# Altium PCB rookieboard_macrofab.PcbDoc (part 3 of 3)
Units mm, origin at the board's own origin, x right, y up, seen from the top; angles counter-clockwise.
Board outline 100 x 50 mm, 4 copper layers (Top Layer, Ground, Power, Bottom Layer), stack 0.971 mm thick; 136 components, 90 nets, 459 pads, 215 vias.
Unrouted connection lines stored in the file: 2.
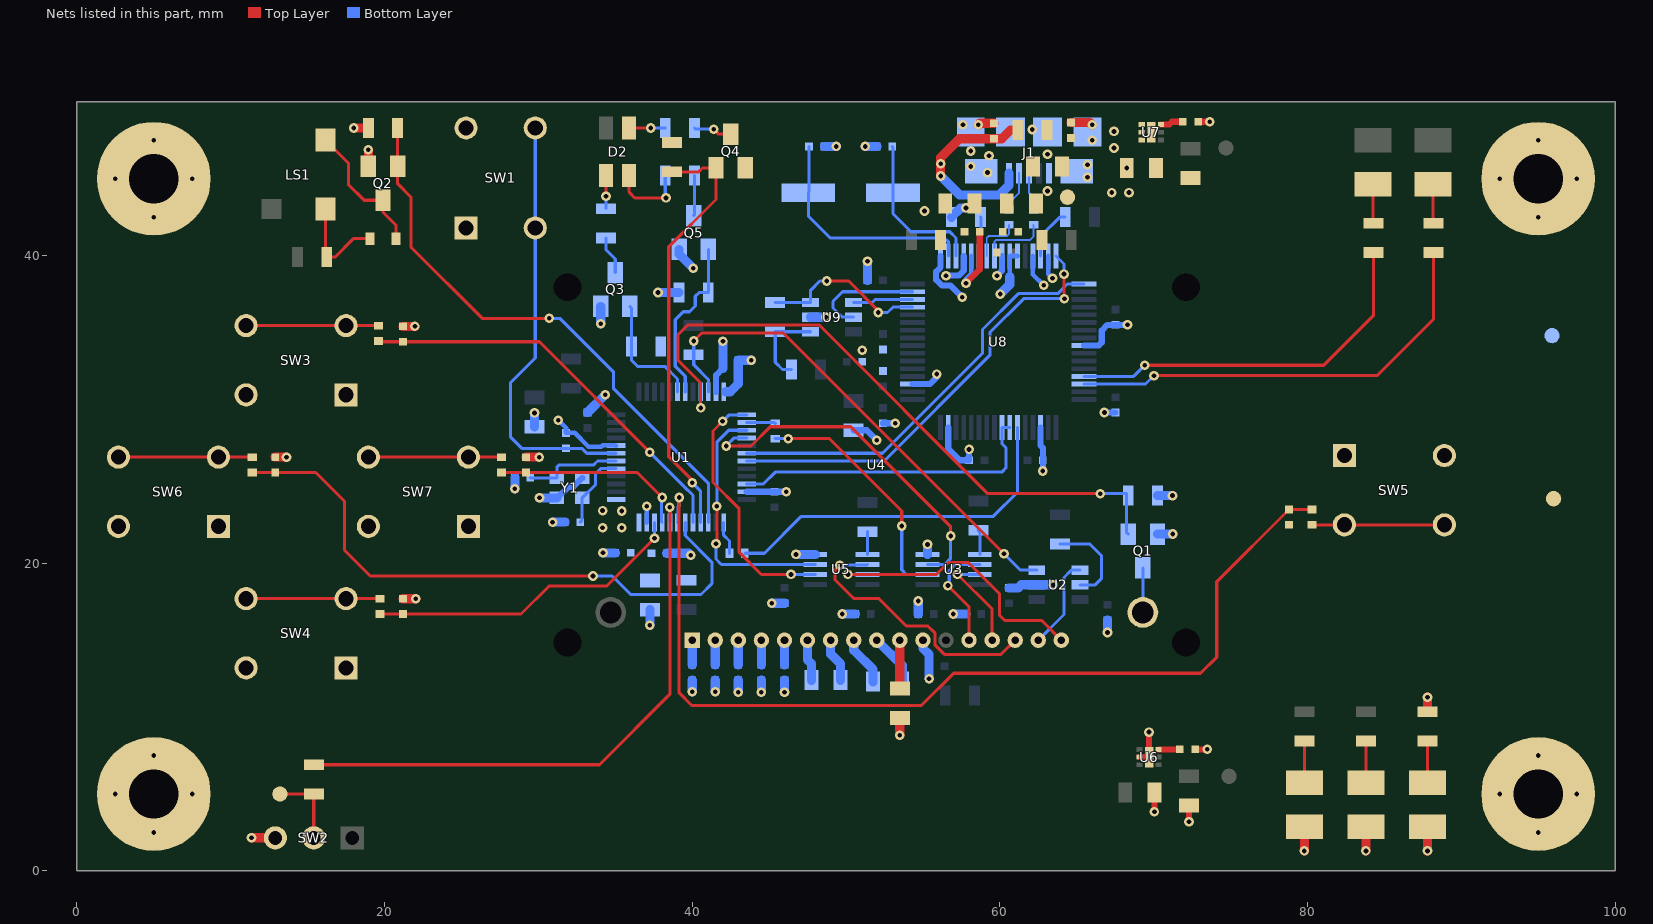
[diagram p4: the nets of this part, all layers, seen from the top]

## Via types
v1: diameter 0.625, hole 0.305, Top Layer to Bottom Layer, tented both sides, 185 vias
v2: diameter 0.625, hole 0.305, Top Layer to Bottom Layer, 16 vias
v3: diameter 0.625, hole 0.305, Top Layer to Bottom Layer, tented top, 11 vias
v4: diameter 0.625, hole 0.305, Top Layer to Bottom Layer, tented bottom, 3 vias

## Nets (pads, with @x,y where several pads share a name; then routed paths per layer and width w, separated by ;. In a path a pad name is that pad's centre, name@x,y a point inside that pad or via, vN(x,y) a via of type N, cw(c..) or ccw(c..) an arc to the next point about the centre after c; other vN are vias at no path point) (continued)
+3V3_MCU_VDD: C2.2 C3.2 C4.2 C5.2 E1.2 U1.1 U1.24 U1.48 | length 3.4
  Bottom Layer w0.6: U1.24@42.177,31.15 42.475,31.15 43,31.675 C3.2@43,33.2 v1(43.85,33.2)
  other v1: 34.175,22.3 35.425,22.3 35.425,23.4 34.175,23.425
+5V: C32.2 C33.2 C37.2 E4.2 R22.2 TP9.1 U7.1 U7.3 | length 0.9
  Top Layer w0.6: R22.2@87.8,10.35 v1(87.8,11.3)
  other v1: 67.275,44.1 68.4,44.1 67.425,47 67.425,48.075
  other v4: 68.25,45.7
+5V_USB: C31.2 E4.1 J1.1 | length 13.8
  Top Layer w0.6: v1(56.15,45.175) v1(56.15,45.975) 56.15,46.375 57.375,47.6 C31.2@59.625,47.6 60.125,47.6 60.7,48.175 E4.1@61.175,48.175
  Bottom Layer w0.6: v1(56.15,45.975) v1(56.15,45.175) 57.375,43.95 59.975,43.95 60.6,44.575 J1.1@60.6,45.362
+VPHY_FT: C43.2 C44.2 E5.2 U8.4 | length 2.2
  Bottom Layer w0.4: v1(56.5,38.7) 57.317,38.7 57.65,39.033 U8.4@57.65,39.975
  other v1: 55.1,42.9
+VPLL_FT: C45.2 C46.2 E6.2 U8.9 | length 1.4
  Bottom Layer w0.4: v1(59.817,38.7) 60.132,39.015 60.132,39.957 U8.9@60.15,39.975
GND: C1.1 C2.1 C3.1 C4.1 C5.1 C6.1 C7.1 C8.1 C9.1 C10.1 C11.1 C12.2 C13.1 C14.1 C15.1 C16.2 C17.2 C18.2 C19.2 C20.2 C22.1 C23.1 C25.1 C26.1 C27.1 C28.1 C29.1 C30.1 C31.1 C32.1 C33.1 C34.1 C35.1 C36.1 C37.1 C38.1 C39.1 C40.1 C41.1 C42.1 C43.1 C44.1 C45.1 C46.1 C47.1 C48.1 C49.1 C50.1 C51.1 C52.1 C53.1 C54.1 C55.1 C56.1 D3.1 D4.1 D5.1 J1.5 J1.6 J1.7 J1.8 J1.9 J1.10 J1.11 MH1.1 MH2.1 MH3.1 MH4.1 Q1.2 Q2.2 Q3.2 Q4.2 Q5.2 R7.1 R12.1 R16.1 R18.1 R19.1 R28.1 SW1.1 SW1.2 SW2.3 SW3.1 SW3.2 SW4.1 SW4.2 SW5.1 SW5.2 SW6.1 SW6.2 SW7.1 SW7.2 TP6.1 TP7.1 U1.8 U1.23 U1.35 U1.47 U2.2 U3.4 U4.11 U5.4 U6.2@69.075,7.4 U6.7 U7.2@69.225,48.025 U7.7 U8.1 U8.5 U8.10 U8.11 U8.13 U8.15 U8.25 U8.35 U8.47 U8.51 U9.2 Y1.2 Y1.4 | length 102.4
  Top Layer w0.4: v1(57.8,38.2) 58.7,39.1 58.7,39.592 58.696,39.596 58.696,41.546 C44.1@58.7,41.55 ; U6.2@69.075,7.4 69.692,7.4 U6.7@69.7,7.392 v1(69.7,9.025) ; v1(70.05,3.85) C34.1@70.05,5.1 ; v1(72.3,3.2) C35.1@72.3,4.25 ; C36.1@72.7,7.9 v1(73.475,7.9) ; C39.1@72.9,48.7 v1(73.65,48.7)
  Top Layer w0.6: v1(11.35,2.15) SW2.3@12.9,2.15 ; C29.1@12.9,26.9 v1(13.625,26.9) ; v1(18,48.3) R12.1@18.95,48.3 ; Q2.2@18.95,45.8 v1(18.95,46.875) ; C27.1@21.2,17.7 v1(22.025,17.7) ; C26.1@21.2,35.4 v1(21.975,35.4) ; C30.1@29.2,26.9 v1(30.05,26.9) ; v1(53.5,8.825) C25.1@53.5,9.95 ; v3(58.6,48.5) 58.7,48.6 C31.1@59.625,48.6 ; C32.1@64.625,48.65 65.85,48.65 v3(66,48.5) ; v1(79.8,1.3) D5.1@79.8,2.875 ; v1(83.8,1.3) D4.1@83.8,2.875 ; v1(87.8,1.3) D3.1@87.8,2.875
  Bottom Layer w0.3: v1(31.3,29.3) 31.8,28.8 C1.1@31.8,28.475 32.359,28.475 33.261,27.573 34.089,27.573 34.189,27.673 35.027,27.673 U1.8@35.05,27.65 ; U1.47@37.05,22.65 v1(37.05,23.7) ; 58.15,38.75 U8.5@58.15,39.975 ; 60.65,38.625 U8.10@60.65,39.975 U8.11@61.15,39.975 ; U8.13@62.15,39.975 62.15,38.775 v1(62.85,38.075) ; U8.15@63.15,39.975 63.15,38.8 v1(63.425,38.525)
  Bottom Layer w0.4: Y1.2@31.2,24.25 31.237,24.25 31.964,24.977 32.277,24.977 Y1.4@32.85,25.55 ; U1.23@41.55,31.15 41.55,32.225 42,32.675 ; U1.35@43.55,24.65 C10.1@45.35,24.65 v1(46.125,24.65) ; C40.1@50.5,28.65 51.35,28.65 v1(52,28) ; C41.1@52.4,29.1 v1(53.2,29.1) ; U8.51@54.325,31.65 55.45,31.65 55.9,32.1 v1(55.9,32.3) ; U8.1@56.15,39.975 56.15,39.254 55.86,38.965 55.86,38.435 56.235,38.06 56.79,38.06 v1(57.55,37.3) ; U8.47@56.65,28.825 56.65,27.45 57.4,26.7 C48.1@58,26.7 v1(58,27.4) ; v1(57.8,38.2) 57.8,38.4 58.15,38.75 ; U8.35@62.65,28.825 62.65,27.65 62.8,27.5 C53.1@62.8,26.7 v1(62.8,26) ; U8.25@65.475,34.15 65.493,34.168 66.435,34.168 66.627,34.36 66.627,35.127 67,35.5 C50.1@67.525,35.5 v1(68.3,35.5) ; v1(66.8,29.8) C49.1@67.525,29.8
  Bottom Layer w0.6: v1(28.475,24.85) C7.1@28.475,25.575 ; C9.1@29.75,28.875 v1(29.75,29.775) ; v1(30.075,24.25) Y1.2@31.2,24.25 ; v1(30.925,22.675) C6.1@31.725,22.675 ; C8.1@33.2,29.8 v1(34.35,30.95) ; v1(34.05,35.575) Q3.2@34.05,36.7 ; v1(34.2,20.675) C4.1@35,20.675 ; v1(37.25,15.975) C5.1@37.25,16.975 ; v1(37.775,37.6) R19.1@39.15,37.6 ; C2.1@38.35,20.65 39.775,20.65 v1(39.9,20.525) ; Q5.2@39.15,40.4 39.15,40.1 v1(40.075,39.175) ; v1(40,11.65) C16.2@40,12.4 ; v1(41.5,11.65) C17.2@41.5,12.4 ; 42,32.675 C3.1@42,33.2 v1(42,34.425) ; v1(43,11.625) C18.2@43,12.4 ; v1(44.5,11.625) C19.2@44.5,12.4 ; v1(45.175,17.4) C22.1@46,17.4 ; v1(46,11.625) C20.2@46,12.4 ; v1(46.75,20.575) U5.4@48,20.575 ; U9.2@47.7,36 v1(48.7,36) ; C55.1@48.6,47.1 v1(49.375,47.1) ; v1(49.75,16.7) C23.1@50.6,16.7 ; v1(51.25,47.1) C56.1@52,47.1 ; C52.1@51.4,38.4 v1(51.4,39.625) ; C14.1@54.7,16.7 v1(54.7,17.55) ; U4.11@55,15 55,14.475 55.4,14.075 C13.1@55.4,13.3 v1(55.4,12.5) ; U3.4@55.3,20.575 v1(55.3,21.225) ; R28.1@56.85,42.5 57.45,43.1 v4(57.8,43.1) ; v1(56.975,16.7) C15.1@57.8,16.7 ; v1(60.025,37.5) 60.65,38.125 60.65,38.625 ; C11.1@60.6,18.4 61.2,18.4 61.4,18.6 U2.2@62.4,18.6 v1(63.475,18.6) ; v1(67,15.5) C12.2@67,16.3 ; Q1.2@70.25,21.9 v1(71.25,21.9) ; R7.1@70.25,24.4 v1(71.225,24.4)
  other v1: 51.05,33.85 63.1,46.6
  other v2: 5,2.5 95,2.5 2.5,5 7.5,5 92.5,5 97.5,5 5,7.5 95,7.5 5,42.5 95,42.5 2.5,45 7.5,45 92.5,45 97.5,45 5,47.5 95,47.5
  other v3: 65.7,45.1 59.2,45.4 58.1,45.8 65.7,45.9 59.3,46.5 58.1,46.8 66,47.5 62.1,48.2 57.6,48.5
  other v4: 63.1,44.2
NetC1_2: C1.2 SW1.3 SW1.4 U1.7 | length 28
  Bottom Layer w0.2: SW1.4@29.8,48.3 SW1.3@29.8,41.8 29.8,33.35 28.2,31.75 28.2,28.2 28.925,27.475 C1.2@31.8,27.475 32.825,27.475 33.15,27.15 U1.7@35.05,27.15
NetC6_2: C6.2 U1.5 Y1.1 | length 5
  Bottom Layer w0.2: C6.2@32.725,22.675 32.85,22.8 Y1.1@32.85,24.25 33.725,25.125 33.725,25.825 34.05,26.15 U1.5@35.05,26.15
NetC7_2: C7.2 U1.6 Y1.3 | length 6.5
  Bottom Layer w0.2: C7.2@29.475,25.575 29.5,25.55 Y1.3@31.2,25.55 31.2,26.25 31.325,26.375 33.575,26.375 33.85,26.65 U1.6@35.05,26.65
NetC16_1: C16.1 U4.1 | length 1.6
  Bottom Layer w0.6: C16.1@40,13.4 U4.1@40,15
NetC17_1: C17.1 U4.2 | length 1.6
  Bottom Layer w0.6: C17.1@41.5,13.4 U4.2@41.5,15
NetC18_1: C18.1 U4.3 | length 1.6
  Bottom Layer w0.6: C18.1@43,13.4 U4.3@43,15
NetC19_1: C19.1 U4.4 | length 1.6
  Bottom Layer w0.6: C19.1@44.5,13.4 U4.4@44.5,15
NetC20_1: C20.1 U4.5 | length 1.6
  Bottom Layer w0.6: C20.1@46,13.4 U4.5@46,15
NetC21_1: C21.1 U4.8 | length 3.2
  Bottom Layer w0.6: U4.8@50.5,15 50.5,14.35 51.75,13.1 C21.1@51.75,12.3
NetC21_2: C21.2 U4.9 | length 3.4
  Bottom Layer w0.6: U4.9@52,15 53.65,13.35 C21.2@53.65,12.3
NetC24_1: C24.1 U4.7 | length 2.9
  Bottom Layer w0.6: U4.7@49,15 49,14.1 49.65,13.45 C24.1@49.65,12.4
NetC24_2: C24.2 U4.6 | length 2.7
  Bottom Layer w0.6: U4.6@47.5,15 47.5,13.725 47.75,13.475 C24.2@47.75,12.4
NetC25_2: C25.2 U4.10 | length 3.1
  Top Layer w0.6: C25.2@53.5,11.85 U4.10@53.5,15
NetC26_2: C26.2 R5.2 U1.41 | length 26.4
  Top Layer w0.2: R5.2@19.6,34.45 19.65,34.4 C26.2@21.2,34.4 30.075,34.4 v1(37.25,27.225)
  Bottom Layer w0.2: v1(37.25,27.225) 39.46,25.015 39.46,25.002 40.05,24.412 U1.41@40.05,22.65
NetC27_2: C27.2 R8.2 U1.46 | length 20.9
  Top Layer w0.2: R8.2@19.7,16.7 C27.2@21.2,16.7 28.875,16.7 30.7,18.525 34.45,18.525 v1(37.55,21.625)
  Bottom Layer w0.2: v1(37.55,21.625) U1.46@37.55,22.65
NetC28_2: C28.2 R10.2 U1.43 | length 64
  Top Layer w0.2: v1(39.15,24.275) 39.15,11.575 39.975,10.75 54.9,10.75 57,12.85 73.05,12.85 74.1,13.9 74.1,18.8 C28.2@78.8,23.5 R10.2@80.3,23.5
  Bottom Layer w0.2: U1.43@39.05,22.65 39.09,22.65 39.09,23.675 39.15,23.735 v1(39.15,24.275)
NetC29_2: C29.2 R11.2 U1.42 | length 40
  Top Layer w0.2: R11.2@11.4,25.9 C29.2@12.9,25.9 15.525,25.9 17.4,24.025 17.4,20.85 19.075,19.175 v1(33.55,19.175)
  Bottom Layer w0.2: v1(33.55,19.175) 34.8,19.175 36,17.975 40.575,17.975 41.275,18.675 41.275,20.075 39.55,21.8 U1.42@39.55,22.65
NetC30_2: C30.2 R17.2 U1.45 | length 12.8
  Top Layer w0.2: R17.2@27.6,25.9 C30.2@29.2,25.9 36.425,25.9 v1(38.05,24.275)
  Bottom Layer w0.2: U1.45@38.05,22.65 38.011,22.69 38.011,24.235 v1(38.05,24.275)
NetC36_2: C36.2 U6.6 | length 1.4
  Top Layer w0.4: U6.6@70.325,7.9 C36.2@71.7,7.9
NetC39_2: C39.2 U7.6 | length 1.5
  Top Layer w0.4: U7.6@70.475,48.525 71.025,48.525 71.2,48.7 C39.2@71.9,48.7
NetC55_2: C55.2 U8.2 Y2.2 | length 15.3
  Bottom Layer w0.2: C55.2@47.6,47.1 47.6,44.15 Y2.2@47.55,44.1 47.55,42.575 48.975,41.15 56.4,41.15 56.65,40.9 U8.2@56.65,39.975
NetC56_2: C56.2 U8.3 Y2.1 | length 10.3
  Bottom Layer w0.2: C56.2@53,47.1 53.05,47.05 Y2.1@53.05,44.1 53.05,42.725 54.225,41.55 56.75,41.55 57.15,41.15 U8.3@57.15,39.975
NetD1_1: D1.1 LS1.2 Q2.3 | length 9
  Top Layer w0.2: LS1.2@16.15,47.523 17.65,46.023 17.65,44.625 18.675,43.6 Q2.3@19.9,43.6 19.9,42.825 20.75,41.975 D1.1@20.75,41.1
NetD1_2: D1.2 LS1.1 R9.1 | length 6.5
  Top Layer w0.2: LS1.1@16.15,43.023 16.15,40 R9.1@16.25,39.9 16.775,39.9 17.975,41.1 D1.2@19.05,41.1
NetD2_1: D2.1 R15.2 | length 5.1
  Top Layer w0.2: D2.1@35.9,45.2 35.9,44.125 36.275,43.75 v1(38.3,43.75)
  Bottom Layer w0.2: R15.2@38.25,45.2 38.25,43.8 v1(38.3,43.75)
NetD2_2: D2.2 R14.2 | length 2.4
  Top Layer w0.2: D2.2@35.9,48.3 v1(37.3,48.3)
  Bottom Layer w0.2: v1(37.3,48.3) R14.2@38.25,48.3
NetD2_3: D2.3 R13.2 | length 2.1
  Top Layer w0.2: v1(34.4,43.85) D2.3@34.4,45.2
  Bottom Layer w0.2: R13.2@34.4,43.05 v1(34.4,43.85)
NetD3_2: D3.2 R22.1 | length 2.7
  Top Layer w0.2: D3.2@87.8,5.725 R22.1@87.8,8.45
NetD4_2: D4.2 R23.1 | length 2.7
  Top Layer w0.2: D4.2@83.8,5.725 R23.1@83.8,8.45
NetD5_2: D5.2 R24.1 | length 2.7
  Top Layer w0.2: D5.2@79.8,5.725 R24.1@79.8,8.45
NetD6_1: D6.1 R25.2 | length 2.6
  Top Layer w0.2: D6.1@84.25,44.65 84.25,42.15 R25.2@84.3,42.1
NetD7_1: D7.1 R26.2 | length 2.6
  Top Layer w0.2: D7.1@88.15,44.65 88.15,42.15 R26.2@88.2,42.1
NetQ1_1: Q1.1 R7.2 U1.21 | length 43.1
  Top Layer w0.2: v1(40.55,30.1) 40.55,31.725 39.075,33.2 39.075,34.85 39.725,35.5 48.25,35.5 59.225,24.525 v1(66.525,24.525)
  Bottom Layer w0.2: v1(40.55,30.1) U1.21@40.55,31.15 ; v1(66.525,24.525) 68.225,24.525 68.225,22.025 Q1.1@68.35,21.9
NetQ1_3: Q1.3 U4.19 | length 2.9
  Bottom Layer w0.2: U4.19@69.3,16.8 Q1.3@69.3,19.7
NetQ2_1: Q2.1 R12.2 U1.39 | length 37
  Top Layer w0.2: R12.2@20.85,48.3 Q2.1@20.85,45.8 20.85,44.675 21.725,43.8 21.725,40.55 26.35,35.925 v1(30.7,35.925)
  Bottom Layer w0.2: v1(30.7,35.925) 31.4,35.925 34.875,32.45 34.875,31.375 41.05,25.2 U1.39@41.05,22.65
NetQ3_1: Q3.1 R16.2 U1.18 | length 7.9
  Bottom Layer w0.2: Q3.1@35.95,36.7 36.05,36.6 R16.2@36.05,34.1 36.05,33.2 36.45,32.8 38.225,32.8 39.05,31.975 U1.18@39.05,31.15
NetQ3_3: Q3.3 R13.1 | length 2.5
  Bottom Layer w0.2: R13.1@34.4,41.15 34.4,40.375 35,39.775 Q3.3@35,38.9
NetQ4_1: Q4.1 R18.2 U1.40 | length 28.1
  Top Layer w0.2: R18.2@38.7,45.45 40.425,45.45 40.675,45.7 Q4.1@41.55,45.7 41.55,43.65 38.475,40.575 38.475,26.925 40,25.4 v1(40,25.225)
  Bottom Layer w0.2: v1(40,25.225) 40.55,24.675 U1.40@40.55,22.65
NetQ4_3: Q4.3 R14.1 | length 2.5
  Top Layer w0.2: v1(41.4,48.225) 41.725,47.9 Q4.3@42.5,47.9
  Bottom Layer w0.2: R14.1@40.15,48.3 40.225,48.225 v1(41.4,48.225)
NetQ5_1: Q5.1 R19.2 U1.19 | length 11
  Bottom Layer w0.2: U1.19@39.55,31.15 39.55,32.15 38.9,32.8 38.9,35.825 39.425,36.35 39.825,36.35 40.2,36.725 40.2,37.35 40.45,37.6 R19.2@41.05,37.6 Q5.1@41.05,40.4
NetQ5_3: Q5.3 R15.1 | length 2.6
  Bottom Layer w0.2: Q5.3@40.1,42.6 40.15,42.65 R15.1@40.15,45.2
NetR1_1: R1.1 SW2.2 TP1.1 | length 5.1
  Top Layer w0.2: TP1.1@13.2,5 R1.1@15.4,5 SW2.2@15.4,2.15
NetR1_2: R1.2 U1.44 | length 38.2
  Top Layer w0.2: R1.2@15.4,6.9 33.975,6.9 38.55,11.475 v1(38.55,23.65)
  Bottom Layer w0.2: U1.44@38.55,22.65 v1(38.55,23.65)
NetR2_1: R2.1 U1.22 U2.3 | length 32.6
  Top Layer w0.2: v1(40.1,34.45) 40.625,34.975 45.925,34.975 v1(60.275,20.625)
  Bottom Layer w0.2: v1(40.1,34.45) R2.1@40.1,33.55 40.1,32.9 41.05,31.95 U1.22@41.05,31.15 ; v1(60.275,20.625) 61.35,19.55 U2.3@62.4,19.55
NetR3_2: R3.2 U2.5 | length 6.1
  Bottom Layer w0.2: R3.2@63.9,21.25 65.85,21.25 66.6,20.5 66.6,19 66.2,18.6 U2.5@65.2,18.6
NetR4_2: R4.2 U3.5 | length 1.6
  Bottom Layer w0.2: R4.2@58.6,22.15 58.7,22.05 U3.5@58.7,20.575
NetR5_1: R5.1 SW3.3 SW3.4 | length 8.6
  Top Layer w0.2: SW3.4@11,35.45 SW3.3@17.5,35.45 R5.1@19.6,35.45
NetR6_2: R6.2 U5.5 | length 1.5
  Bottom Layer w0.2: U5.5@51.4,20.575 R6.2@51.4,22.05
NetR8_1: R8.1 SW4.3 SW4.4 | length 8.7
  Top Layer w0.2: SW4.4@11,17.7 SW4.3@17.5,17.7 R8.1@19.7,17.7
NetR10_1: R10.1 SW5.3 SW5.4 | length 8.6
  Top Layer w0.2: R10.1@80.3,22.5 SW5.3@82.4,22.5 SW5.4@88.9,22.5
NetR11_1: R11.1 SW6.3 SW6.4 | length 8.7
  Top Layer w0.2: SW6.4@2.7,26.9 R11.1@11.4,26.9
NetR17_1: R17.1 SW7.3 SW7.4 | length 8.6
  Top Layer w0.2: SW7.4@18.95,26.9 SW7.3@25.45,26.9 R17.1@27.6,26.9
NetR20_2: R20.2 U8.7 | length 3.3
  Bottom Layer w0.127: U8.7@59.15,39.975 59.15,41.15 59.275,41.275 60.45,41.275 60.6,41.425 R20.2@60.6,42
NetR21_2: R21.2 U8.8 | length 4.4
  Bottom Layer w0.13: U8.8@59.65,39.975 59.65,40.9 59.769,41.019 61.969,41.019 62.2,41.25 R21.2@62.2,42
NetR27_2: R27.2 U8.14 | length 3.4
  Bottom Layer w0.2: U8.14@62.65,39.975 62.65,41.25 63.9,42.5 R27.2@64.25,42.5
NetR28_2: R28.2 U8.6 | length 2.6
  Bottom Layer w0.2: U8.6@58.65,39.975 58.65,41.275 58.775,41.4 58.775,42.475 R28.2@58.75,42.5
NetR29_2: R29.2 R30.1 U9.1 | length 5.5
  Bottom Layer w0.2: R29.2@46.45,32.6 45.875,32.6 45.4,33.075 R30.1@45.4,35.05 U9.1@47.7,35.05
NetR30_2: R30.2 U8.61 U9.3 | length 11
  Top Layer w0.2: v1(48.75,38.35) 50.175,38.35 52.1,36.425 v1(52.1,36.3)
  Bottom Layer w0.2: R30.2@45.4,36.95 U9.3@47.7,36.95 47.7,37.75 48.3,38.35 v1(48.75,38.35) ; v1(52.1,36.3) 52.7,36.3 53.05,36.65 U8.61@54.325,36.65
NetR31_1: R31.1 U1.26 | length 1.9
  Bottom Layer w0.2: U1.26@43.55,29.15 45.35,29.15 R31.1@45.4,29.1
NetR31_2: R31.2 U3.2 | length 15.8
  Top Layer w0.2: v1(46.25,28.1) 48.925,28.1 53.625,23.4 v1(53.625,22.425)
  Bottom Layer w0.2: R31.2@45.4,28.1 v1(46.25,28.1) ; v1(53.625,22.425) 53.625,19.575 53.925,19.275 U3.2@55.3,19.275
NetR32_2: R32.2 U1.37 | length 2.2
  Bottom Layer w0.2: U1.37@42.05,22.65 42.05,21.825 42.425,21.45 R32.2@42.425,20.65
NetU1_25: U1.25 U5.2 | length 16.8
  Top Layer w0.2: v1(41.975,29.225) 41.35,28.6 41.35,25.25 43.05,23.55 43.05,20.725 44.5,19.275 v1(46.425,19.275)
  Bottom Layer w0.2: v1(41.975,29.225) 42.4,29.65 U1.25@43.55,29.65 ; v1(46.425,19.275) U5.2@48,19.275
NetU1_27: U1.27 U5.3 | length 16.5
  Top Layer w0.2: v1(41.55,21.275) 41.6,21.325 v1(41.6,23.7)
  Bottom Layer w0.2: v1(41.55,21.275) 41.55,20.275 41.9,19.925 U5.3@48,19.925 ; v1(41.6,23.7) 41.6,27.875 42.375,28.65 U1.27@43.55,28.65
NetU1_28: U1.28 U3.3 | length 23.1
  Top Layer w0.2: v1(42.225,27.625) 43.825,27.625 45.075,28.875 50.3,28.875 56.8,22.375 v1(56.8,21.775)
  Bottom Layer w0.2: v1(42.225,27.625) 42.2,27.625 42.725,28.15 U1.28@43.55,28.15 ; U3.3@55.3,19.925 56.4,19.925 56.8,20.325 v1(56.8,21.775)
NetU1_34: U1.34 U8.39 U8.40 | length 20.5
  Bottom Layer w0.2: U1.34@43.55,25.15 44.625,25.15 45.4,25.925 60.125,25.925 60.4,26.2 60.4,27.5 60.15,27.75 U8.40@60.15,28.825 U8.39@60.65,28.825
NetU2_4: U2.4 U4.16 | length 6
  Bottom Layer w0.2: U4.16@62.5,15 64.175,16.675 64.175,19.075 64.65,19.55 U2.4@65.2,19.55
NetU3_6: U3.6 U4.13 | length 7.3
  Top Layer w0.2: v1(56.625,18.55) 58,17.175 U4.13@58,15
  Bottom Layer w0.2: v1(56.625,18.55) 56.71,18.635 56.71,19.535 57.1,19.925 U3.6@58.7,19.925
NetU3_7: U3.7 U4.14 | length 6.7
  Top Layer w0.2: v1(57.25,19.275) 59.5,17.025 U4.14@59.5,15
  Bottom Layer w0.2: v1(57.25,19.275) U3.7@58.7,19.275
NetU4_15: U4.15 U5.6 | length 17.5
  Top Layer w0.2: v1(49.6,19.875) 49.275,19.55 49.275,18.95 50.525,17.7 52.15,17.7 53.925,15.925 55.325,15.925 55.775,15.475 55.775,15.303 55.773,15.301 55.773,14.699 56.397,14.075 60.075,14.075 U4.15@61,15
  Bottom Layer w0.2: v1(49.6,19.875) 51.35,19.875 U5.6@51.4,19.925
NetU4_17: U4.17 U5.7 | length 18.4
  Top Layer w0.2: v1(50.125,19.275) 55.875,19.275 56.65,20.05 57.95,20.05 59.975,18.025 59.975,16.625 60.325,16.275 62.725,16.275 U4.17@64,15
  Bottom Layer w0.2: v1(50.125,19.275) U5.7@51.4,19.275
NetU8_62: U8.62 U9.4 | length 3.9
  Bottom Layer w0.2: U9.4@50.5,36.95 51.7,36.95 51.9,37.15 U8.62@54.325,37.15
NetU8_63: U8.63 U9.5 | length 7.5
  Bottom Layer w0.2: U9.5@50.5,36 49.75,36 49.15,36.6 49.15,37.025 49.775,37.65 U8.63@54.325,37.65
RX_LED: R25.1 U8.29 | length 24.5
  Top Layer w0.2: v1(69.425,32.875) 81.05,32.875 84.3,36.125 R25.1@84.3,40.2
  Bottom Layer w0.2: U8.29@65.475,32.15 68.7,32.15 v1(69.425,32.875)
SWD_FTDI_TCK: R32.1 U8.38 | length 23.6
  Bottom Layer w0.2: R32.1@43.425,20.65 44.7,20.65 47.1,23.05 59.575,23.05 61.15,24.625 U8.38@61.15,28.825
TX_LED: R26.1 U8.30 | length 28.8
  Top Layer w0.2: v1(70.025,32.2) 84.525,32.2 88.2,35.875 R26.1@88.2,40.2
  Bottom Layer w0.2: U8.30@65.475,31.65 69.475,31.65 v1(70.025,32.2)
UART_FTDI_RX: U1.30 U8.17 | length 27.4
  Bottom Layer w0.2: U1.30@43.55,27.15 52.375,27.15 58.875,33.65 58.875,35.2 61.202,37.527 63.764,37.527 64.387,38.15 U8.17@65.475,38.15
UART_FTDI_TX: U1.31 U8.16 | length 28.9
  Top Layer w0.2: v1(64.175,38.8) 64.175,37.225 v1(64.2,37.2)
  Bottom Layer w0.2: U1.31@43.55,26.65 52.487,26.65 59.352,33.515 59.352,35.002 61.55,37.2 v1(64.2,37.2) ; U8.16@63.65,39.975 64.175,39.45 v1(64.175,38.8)
USB_D_R_N: J1.2 R20.1 | length 2.6
  Bottom Layer w0.127: R20.1@60.6,43 60.6,43.425 61.25,44.075 J1.2@61.25,45.362
USB_D_R_P: J1.3 R21.1 | length 2.5
  Bottom Layer w0.127: J1.3@61.9,45.362 61.9,44.075 62.2,43.775 R21.1@62.2,43
pads on no net: J1.4 LS1.3 U1.2 U1.3 U1.4 U1.10 U1.11 U1.12 U1.13 U1.14 U1.15 U1.16 U1.17 U1.20 U1.29 U1.32 U1.33 U1.38 U4.20 U6.2@69.7,6.975 U6.2@69.7,7.4 U6.2@69.7,7.825 U6.5 U7.2@69.85,47.6 U7.2@69.85,48.025 U7.2@69.85,48.45 U7.5 U8.18 U8.19 U8.21 U8.22 U8.23 U8.24 U8.26 U8.27 U8.28 U8.32 U8.33 U8.34 U8.36 U8.41 U8.43 U8.44 U8.45 U8.46 U8.48 U8.52 U8.53 U8.54 U8.55 U8.57 U8.58 U8.59 U8.60

## Polygon pours and split planes (outlines as drawn)
GND on Bottom Layer "GND_L04_P072" (solid, remove dead copper, pour order 72): 0.6,0.55 0.6,49.425 99.4,49.425 99.4,0.55
+3V3_MCU_VDD on Bottom Layer "+3V3_MCU_VDD_L04_P068" (solid, remove dead copper, pour order 68): 33.625,24.3 33.625,21.3 35.625,21.3 35.625,19.3 36.675,18.25 40.275,18.25 40.725,18.7 40.725,19.8 38.5,19.8 37.875,20.425 37.875,20.925 37.65,21.15 37.075,21.15 36.75,21.475 36.75,23.35 35.8,24.3
GND on Bottom Layer "GND_L04_P010" (solid, remove dead copper, pour order 10): 62.9,46.3 62.9,44.6 66.8,44.6 66.8,49.2 57.2,49.2 57.2,49.1 57.2,45 57.8,44.4 59.8,44.4 60.1,44.7 60.1,46.3
+3V0 on Bottom Layer "+3V0_L04_P026" (solid, remove dead copper, pour order 26): 50.6,18.9 53.5,18.9 53.5,17.5 52.3,16.3 51.2,16.3 51.2,18.3 50.6,18.3
+3V0 on Bottom Layer "+3V0_L04_P028" (solid, remove dead copper, pour order 28): 59.5,18.8 57.9,18.8 57.9,18 58.4,17.5 58.4,15.7 58.7,15.4 58.9,15.4 59.5,16
+3V0 on Bottom Layer "+3V0_L04_P032" (solid, remove dead copper, pour order 32): 64.6,18 66.4,18 66.9,18.5 66.9,19.3 67.4,19.8 68.3,19.8 68.6,19.5 68.6,17.9 67.6,16.9 65,16.9 64.6,17.3
+3V0_LCD on Bottom Layer "+3V0_LCD_L04_P034" (solid, remove dead copper, pour order 34): 56,10.6 56,14.2 55.8,14.4 55.8,15.7 56,15.9 57,15.9 57.3,15.6 57.3,10.6
+3V0 on Bottom Layer "+3V0_L04_P036" (solid, remove dead copper, pour order 36): 57.9,12.5 60.9,12.5 60.9,10.3 57.9,10.3
+1V8_FT on Bottom Layer "+1V8_FT_L04_P038" (solid, remove dead copper, pour order 38): 55.2,30.8 51.7,30.8 51.2,31.3 48.6,31.3 48.6,29.7 55.2,29.7
GND on Bottom Layer "GND_L04_P052" (solid, remove dead copper, pour order 52): 53.3,31.5 52.7,32.1 51.3,32.1 50.5,32.9 50.5,34.4 52.8,34.4 52.9,34.3 52.9,32.4 53.4,31.9 54.325,31.9 54.325,31.5
+3V3 on Bottom Layer "+3V3_L04_P054" (solid, remove dead copper, pour order 54): 55.2,35.4 49.4,35.4 47.4,33.4 47.4,31.6 51.3,31.6 51.9,31 55.2,31
GND on Top Layer "GND_L01_P070" (solid, remove dead copper, pour order 70): 0.65,49.375 0.65,0.625 99.375,0.625 99.375,49.375
GND on Top Layer "GND_L01_P064" (solid, remove dead copper, pour order 64): 58.6,47 58.5,47.1 57.6,47.1 57.6,43.8 57.2,43.4 57.2,42.8 57.9,42.1 57.9,39 57,38.1 57,36.675 62.925,36.675 63.7,37.45 63.7,47
+VPLL_FT on Top Layer "+VPLL_FT_L01_P062" (solid, remove dead copper, pour order 62): 60.2,40.7 60.2,39.8 59.2,38.8 59.2,38.1 62.2,38.1 63.3,39.2 63.3,41.8 62.1,41.8 61.3,42.6 61.3,44.2 59.4,44.2 59.4,42.2 60.6,42.2 60.7,42.1 60.7,41.2
+3V3 on Top Layer "+3V3_L01_P066" (solid, remove dead copper, pour order 66): 68.8,43 64,43 63.9,42.9 63.9,39.6 68.8,39.6
+VPHY_FT on Top Layer "+VPHY_FT_L01_P040" (solid, remove dead copper, pour order 40): 57.85,38.95 57.9,39 57.9,41 58.1,41.2 58.1,41.9 57,43 57,44.2 54.4,44.2 54.4,42.1 54.5,42 55.7,42 55.7,38.8 56.2,38.3 57.2,38.3
+3V3 on Top Layer "+3V3_L01_P020" (solid, remove dead copper, pour order 20): 69.275,1.65 61.275,1.65 61.275,8.75 69.275,8.75 69.275,7.75 68.525,7.75 68.525,7.05 69.275,7.05
+3V3 on Top Layer "+3V3_L01_P016" (solid, remove dead copper, pour order 16): 74.2,47.7 74.175,47.725 74.175,48.5 90.525,48.5 90.525,46.1 83.275,46.1 82.175,45 82.175,41.575 73.65,41.575 73.65,45.525 72.925,46.25 71.475,46.25 70.375,47.35 70.275,47.35 70.275,47.7
+5V on Top Layer "+5V_L01_P014" (solid, remove dead copper, pour order 14): 69.425,48.375 69.425,48.75 66.875,48.75 66.175,48.05 64.55,48.05 63.575,49.025 62.55,49.025 62.55,47.15 63.575,47.15 63.575,43.125 69.025,43.125 69.025,47.075 69.425,47.075 69.425,47.675 68.9,47.675 68.875,47.675 68.875,48.375
+3V0 on Top Layer "+3V0_L01_P022" (solid, remove dead copper, pour order 22): 70.125,7.05 77.825,7.05 77.825,1.75 74.075,1.75 73.45,2.375 73.45,5.25 71.725,5.25 70.9,6.075 70.125,6.075 70.125,6.65
GND on Ground (split plane): 99.49,0.51 0.51,0.51 0.51,49.49 99.49,49.49
+1V8_FT on Power (split plane): 62.298,37.3 62.306,37.261 62.328,37.228 63.698,35.858 63.698,24.902 61.102,24.902 61.102,29.2 61.094,29.239 61.072,29.272 61.039,29.294 61,29.302 48.002,29.302 48.002,31.398 54.1,31.398 54.139,31.406 54.172,31.428 54.194,31.461 54.202,31.5 54.202,37.1 54.202,37.298 60.3,37.298 60.339,37.306 60.372,37.328 60.394,37.361 60.402,37.4 60.402,39.598 62.298,39.598
+VPHY_FT on Power (split plane): 58.498,37.502 54.202,37.502 54.202,43.858 54.242,43.898 58.498,43.898
+5V on Power (split plane): 71.398,44.8 71.406,44.761 71.428,44.728 87.098,29.058 87.098,18.7 87.106,18.661 87.128,18.628 88.598,17.158 88.598,10.402 86.902,10.402 86.902,15.4 86.894,15.439 86.872,15.472 86.772,15.572 84.202,18.142 84.202,29.2 84.194,29.239 84.172,29.272 72.072,41.372 72.039,41.394 72,41.402 68.542,41.402 66.502,43.442 66.502,49.49 71.398,49.49
+3V0 on Power (split plane): 80.398,12.258 80.398,8.142 77.728,5.472 77.706,5.439 77.698,5.4 77.698,0.51 72.202,0.51 72.202,5.5 72.194,5.539 72.172,5.572 68.072,9.672 68.039,9.694 68,9.702 39.942,9.702 33.102,16.542 33.102,18.198 51.5,18.198 51.539,18.206 51.572,18.228 51.594,18.261 51.602,18.3 51.602,18.708 52.192,19.298 53.648,19.298 53.648,17.44 53.631,17.414 53.623,17.375 53.631,17.336 53.653,17.303 55.053,15.903 55.086,15.881 55.125,15.873 57.3,15.873 57.339,15.881 57.372,15.903 58.017,16.548 63.85,16.548 63.889,16.556 63.922,16.578 67.142,19.798 72.858,19.798
+3V3_MCU_VDD on Power (split plane): 45.145,21.389 44.108,20.352 41.575,20.352 41.536,20.344 41.503,20.322 40.903,19.722 40.881,19.689 40.873,19.65 40.873,18.402 33.141,18.402 33.141,34.147 33.267,34.273 45.145,34.273
+3V3 on Power (split plane): 99.49,0.51 77.902,0.51 77.902,5.358 80.572,8.028 80.594,8.061 80.602,8.1 80.602,12.3 80.594,12.339 80.572,12.372 72.972,19.972 72.939,19.994 72.9,20.002 67.1,20.002 67.061,19.994 67.028,19.972 63.808,16.752 57.975,16.752 57.936,16.744 57.903,16.722 57.258,16.077 55.167,16.077 53.851,17.394 53.852,17.4 53.852,19.4 53.844,19.439 53.822,19.472 53.789,19.494 53.75,19.502 52.15,19.502 52.111,19.494 52.078,19.472 51.428,18.822 51.406,18.789 51.398,18.75 51.398,18.402 41.077,18.402 41.077,19.608 41.617,20.148 44.15,20.148 44.189,20.156 44.222,20.178 45.319,21.275 45.341,21.308 45.349,21.347 45.349,34.447 45.341,34.486 45.319,34.519 45.286,34.541 45.247,34.549 45.208,34.541 45.175,34.519 45.153,34.486 45.151,34.477 33.225,34.477 33.186,34.469 33.153,34.447 32.967,34.261 32.945,34.228 32.937,34.189 32.937,18.381 32.928,18.372 32.906,18.339 32.898,18.3 32.898,16.5 32.906,16.461 32.928,16.428 39.828,9.528 39.861,9.506 39.9,9.498 67.958,9.498 71.998,5.458 71.998,0.51 0.51,0.51 0.51,49.49 66.298,49.49 66.298,43.4 66.306,43.361 66.328,43.328 68.428,41.228 68.461,41.206 68.5,41.198 71.958,41.198 83.998,29.158 83.998,18.1 84.006,18.061 84.028,18.028 86.628,15.428 86.698,15.358 86.698,10.3 86.706,10.261 86.728,10.228 86.761,10.206 86.8,10.198 88.7,10.198 88.739,10.206 88.772,10.228 88.794,10.261 88.802,10.3 88.802,17.2 88.794,17.239 88.772,17.272 87.302,18.742 87.302,29.1 87.294,29.139 87.272,29.172 71.602,44.842 71.602,49.49 99.49,49.49

## Other copper
Power (plane layer: these items are gaps in the copper):
  lines w0.2: 40.975,18.3 40.975,19.65 41.575,20.25 44.15,20.25 45.247,21.347 45.247,34.447 ; 45.175,34.375 33.225,34.375 33.039,34.189 33.039,18.339 33,18.3 ; 54.1,37.4 58.6,37.4 ; 66.8,50 66.4,49.6 66.4,43.4 68.5,41.3 72,41.3 84.1,29.2 84.1,18.1 86.7,15.5 86.8,15.4 86.8,10.3 88.7,10.3 88.7,17.2 87.2,18.7 87.2,29.1 71.5,44.8 71.5,49.9 71.4,50 ; 72.1,0 72.1,5.5 68,9.6 39.9,9.6 33,16.5 33,18.3 ; 77.8,0 77.8,5.4 80.5,8.1 80.5,12.3 72.9,19.9 67.1,19.9 63.85,16.65 57.975,16.65 57.3,15.975 55.125,15.975 53.725,17.375 53.75,17.4 53.75,19.4 52.15,19.4 51.5,18.75 51.5,18.3 37.7,18.3 33,18.3 ; 58.6,37.4 58.6,44 54.2,44 54.1,43.9 54.1,37.1 54.1,31.5 47.9,31.5 47.9,29.2 61,29.2 61,24.8 63.5,24.8 63.8,24.8 63.8,35.9 62.4,37.3 62.4,39.7 60.3,39.7 60.3,37.4 58.6,37.4

## Silkscreen, mask and mechanical layers (free items; w line width, h text height)
Top Overlay:
  text "RESET MCU" at 24.075,40.3 h1 r90
  text "RX" at 82.5,37.925 h1 r90
  text "TX" at 86.875,37.85 h1 r90
  text "UP" at 13.6,36.4 h1
  text "SELECT" at 83.025,28.55 h1
  text "RIGHT" at 20.075,28 h1
  text "LEFT" at 4.325,27.975 h1
  text "DOWN" at 12.6,18.7 h1
  text "3V" at 78.975,12.5 h1
  text "3.3V" at 82.3,12.45 h1
  text "5V" at 87.1,12.4 h1
  text "MAIN" at 9.5,3.8 h0.7
  text "SYS" at 18.85,3.775 h0.7
  text "Revision A" at 23.5,1.275 h1.52
Top Solder:
  text "RookieBoard" at 40.25,5.225 h4
  text "By Barak Gutman 2018" at 41.3,3.7 h2
Mechanical 1:
  lines w0.2: 0,1 ccw(c1,1) 1,0 99,0 ccw(c99,1) 100,1 100,49 ccw(c99,49) 99,50 1,50 ccw(c1,49) 0,49 0,1